# Altium PCB Placa_FdC.PcbDoc (part 2 of 2)
Units mm, origin at the board's own origin, x right, y up, seen from the top; angles counter-clockwise.
Board outline 100 x 70 mm, 2 copper layers (Top Layer, Bottom Layer), stack 1.571 mm thick; 72 components, 68 nets, 328 pads, 54 vias.
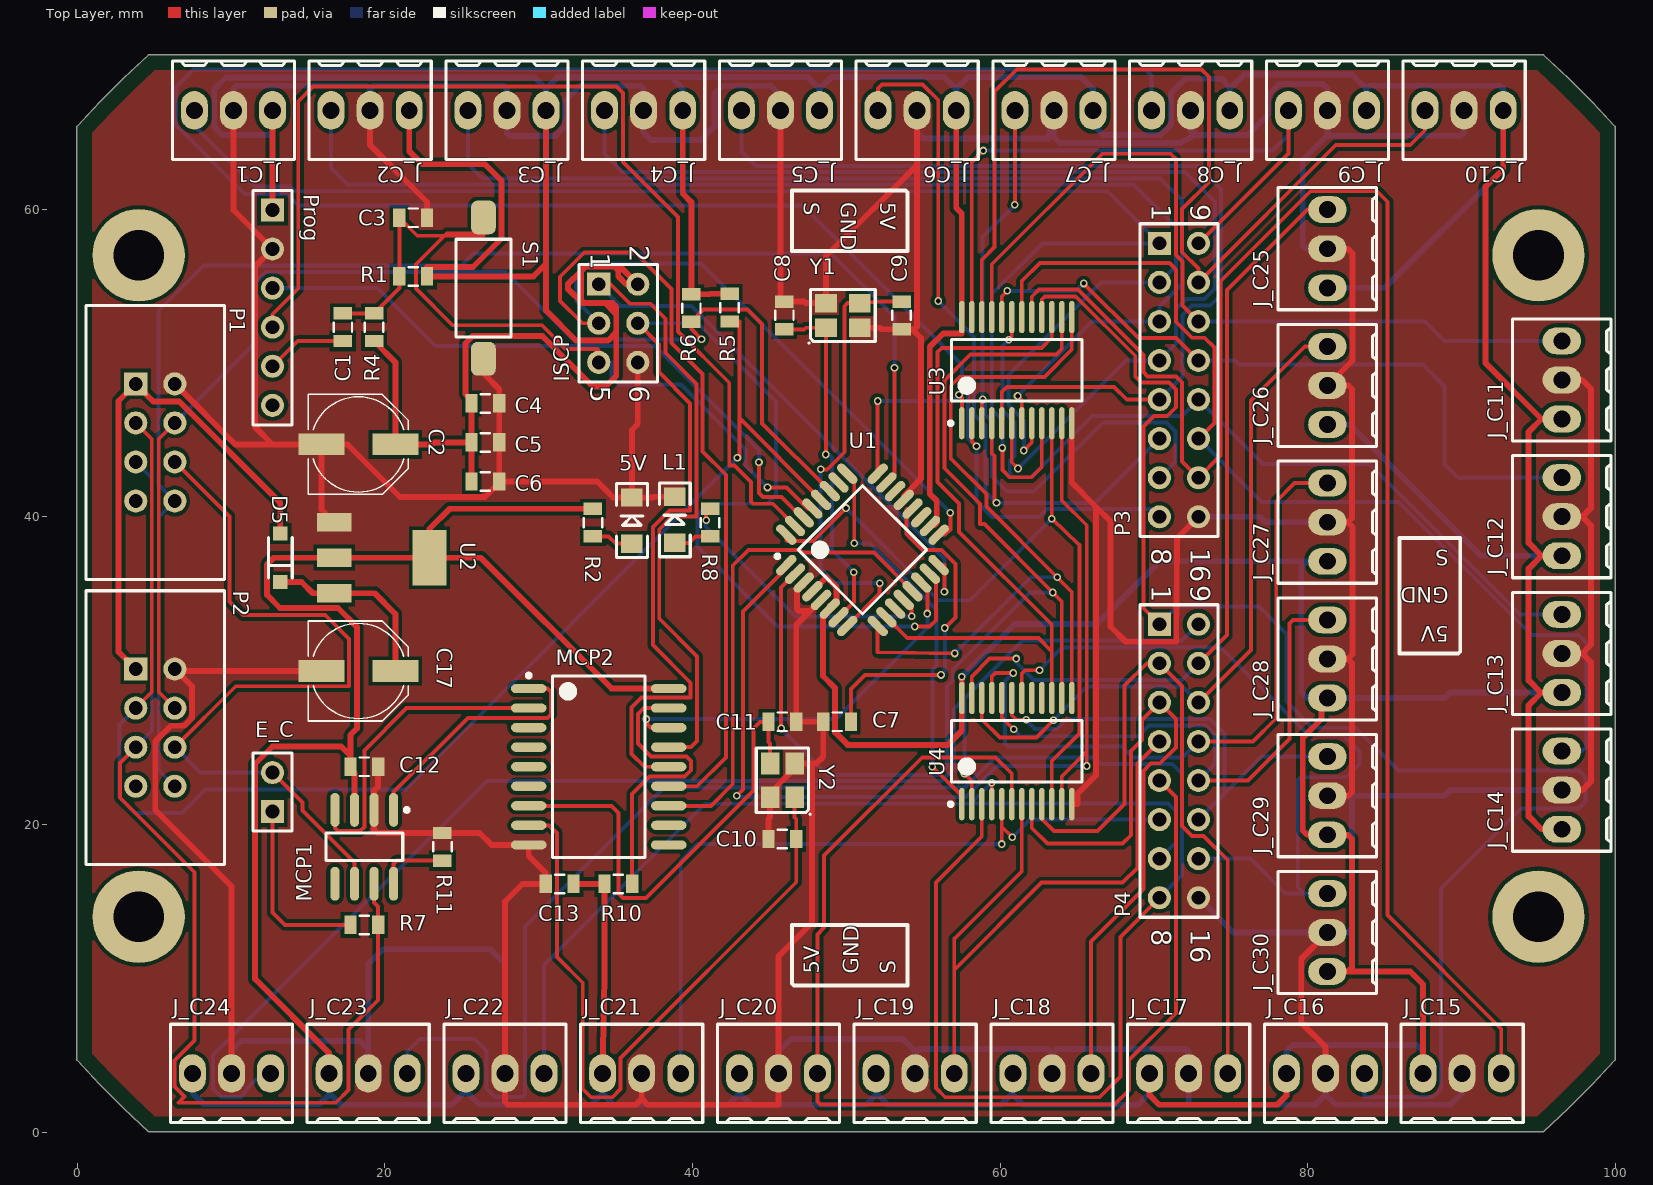
[diagram p0: Top Layer view]

## Silkscreen, mask and mechanical layers (free items; w line width, h text height) (continued)
Mechanical 2: (continued)
  lines w0.2: -0.016,4.679 -0.016,49.637 -0.016,59.899 -0.016,63.291 -0.016,64.707 -0.016,65.129 -0.016,65.297 -0.016,65.345 -0.016,65.373 1.485,66.974 3.036,68.525 4.637,70.026 95.331,70.026 96.932,68.525 98.483,66.974 99.984,65.373 99.984,65.345 99.984,4.679 98.483,3.078 96.932,1.527 95.331,0.026 95.321,0.026 50.803,0.026 22.11,0.026 11.508,0.026 6.877,0.026 5.465,0.026 4.897,0.026 4.732,0.026 4.667,0.026 4.637,0.026 3.036,1.527 1.485,3.078 -0.016,4.679

## Text inside footprints (layer, text, board x,y; h text height)
ISCP: Top Overlay "1" at 33.401,57.15 h1.27 r270; Top Overlay "2" at 35.941,57.658 h1.27 r270; Top Overlay "5" at 33.401,48.514 h1.27 r270; Top Overlay "6" at 35.941,48.514 h1.27 r270
P1: Bottom Overlay "8" at 5.715,38.608 h1.27 r270; Bottom Overlay "7" at 3.302,38.608 h1.27 r270; Bottom Overlay "2" at 5.842,50.165 h1.27 r270; Bottom Overlay "1" at 3.302,50.419 h1.27 r270
P2: Bottom Overlay "8" at 5.715,20.066 h1.27 r270; Bottom Overlay "7" at 3.302,20.066 h1.27 r270; Bottom Overlay "2" at 5.842,31.623 h1.27 r270; Bottom Overlay "1" at 3.302,31.877 h1.27 r270
P3: Top Overlay "9" at 72.39,60.317 h1.27 r270; Top Overlay "1" at 69.85,60.317 h1.27 r270; Top Overlay "8" at 69.85,37.965 h1.27 r270; Top Overlay "16" at 72.39,37.965 h1.27 r270
P4: Top Overlay "9" at 72.39,35.552 h1.27 r270; Top Overlay "1" at 69.85,35.552 h1.27 r270; Top Overlay "8" at 69.85,13.2 h1.27 r270; Top Overlay "16" at 72.39,13.2 h1.27 r270